# Altium PCB EP600_SENSOR_V1.0.1.PcbDoc
Units mil, origin at the board's own origin, x right, y up, seen from the top; angles counter-clockwise.
Board outline 6000 x 4000 mil, 2 copper layers (Top Layer, Bottom Layer); 6 components, 5 nets, 22 pads, 0 vias.
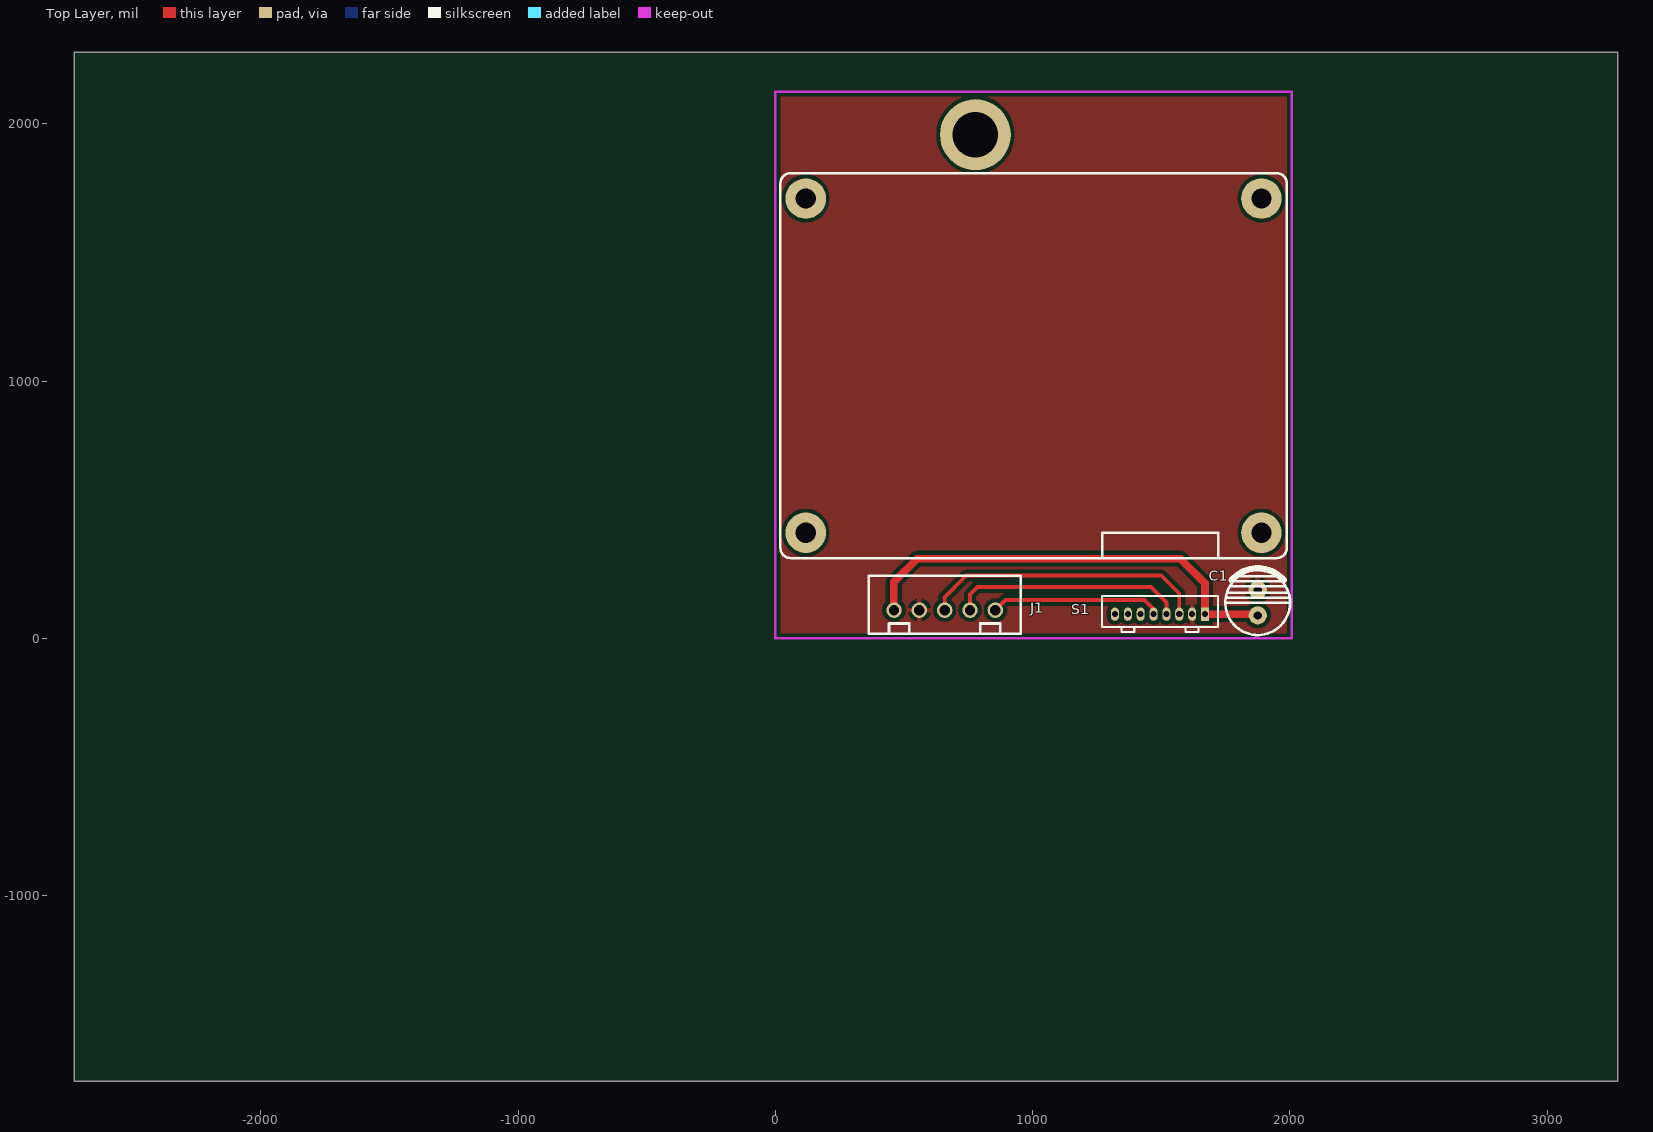
[diagram p0: Top Layer view]
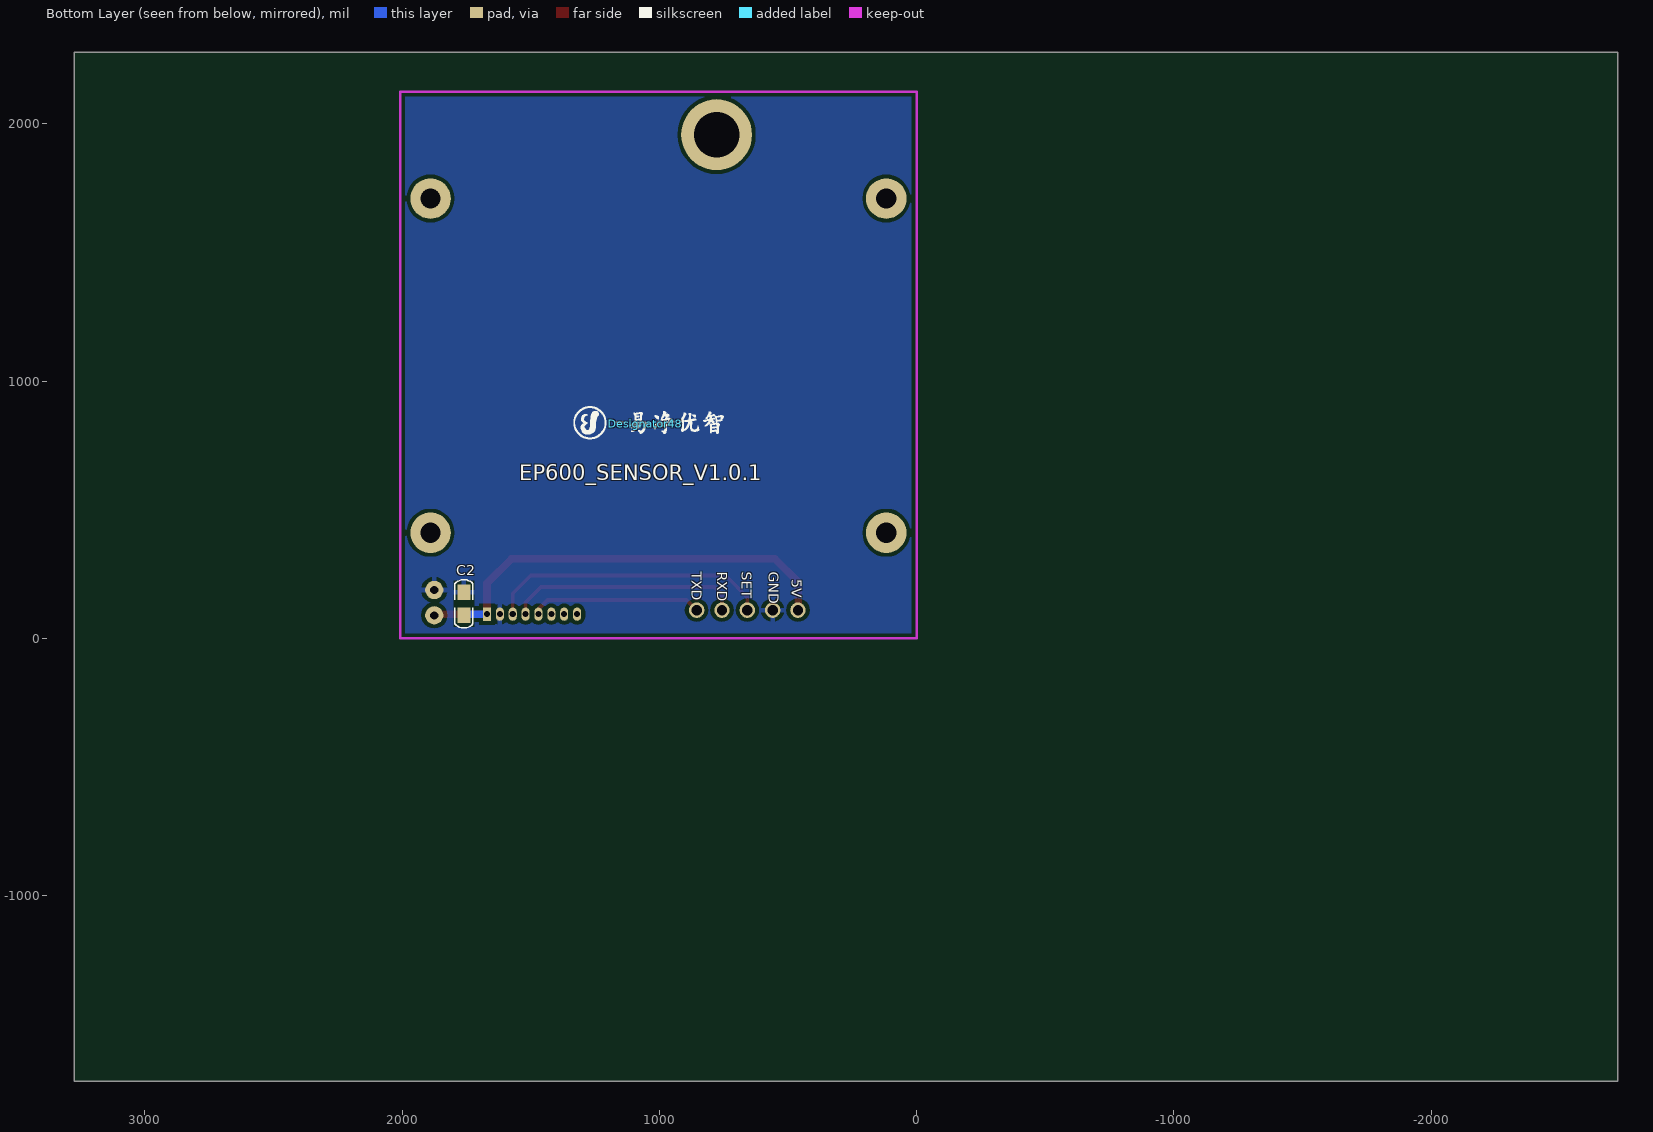
[diagram p1: Bottom Layer view, seen from below]

## Layer stack, top to bottom
Top Layer: signal copper 1.4
Dielectric: dielectric 12.6, FR-4, Dk 4.8
Bottom Layer: signal copper 1.4

## Board outline
-2725.59,-1721.3 3274.41,-1721.3 3274.41,2278.7 -2725.59,2278.7

## Design rules (kind name [scope] priority, off if disabled: settings)
Clearance [All] p1: gap=8
ComponentClearance [All] p1: gap=10 collisioncheckmode=3 verticalgap=10
HoleSize [All] p1: absolutevalues=TRUE maxlimit=500 minlimit=1 maxpercent=80.000 minpercent=20.000
PlaneConnect [All] p1: planeconnectstyle=Relief reliefexpansion=20 reliefentries=4 reliefconductorwidth=20 reliefairgap=10
PolygonConnect [All] p1: connectstyle=Relief reliefconductorwidth=20 reliefentries=4 polygonreliefangle="90 Angle"
RoutingVias [All] p1: holewidth=28 width=50 viastyle="Through Hole" minholewidth=12 minwidth=25 maxholewidth=200 maxwidth=400
SolderMaskExpansion [All] p1: expansion=4
TestPointUsage [All] p1: valid=0 allowmultiple=FALSE
Testpoint [All] p1: side=15 testpointundercomponent=TRUE minsize=40 maxsize=100 preferedsize=60 minholesize=0 maxholesize=40 preferedholesize=32 testpointgrid=1 style=1023 order=0-112345678
Width [All] p1: maxlimit=100 minlimit=10 preferedwidth=10 toplayer_prefwidth=20 bottomlayer_prefwidth=20 minimp=50.000000 maximp=50.000000 favimp=50.000000
16 further rules are at their usual default settings.

## Classes and differential pairs
component class EP600_SENSOR_V1.0: C1 C2 J1 S1

## Components (designator, comment, footprint, x,y, rotation, side; value= is the part's Value field where it differs from the comment)
C1 "100uF/16V" CE06150 1875,90 r180 top
C2 "0.1uF" 0805_C 1760,180 r270 bottom
Designator48 "Comment" PIC_AIRFACTORY-1500 1055,835 r180 bottom
J1 "CON5" XH2.54-5PZ 855,110 r180 top
S1 "PMS5003" "HEADER1X8 1.27" 1495,94.37 r180 top
? "Comment" PMS5003S 117.87,410.98 r0 top

## Footprints (in the part's own frame and the unit in brackets; to place one, negate y for a bottom-side part, rotate by r counter-clockwise, add the part's x,y. Pads: shape width x height; smd on the part's side, far side on the other; paste and mask are expansions set on the pad)
0805_C [mil]
  rect 60x50 smd: 1(0,0) 2(90,0)
  silkscreen extent -48,-35 139,35
CE06150 [mm]
  round 1.8 hole 0.8: 1(0,0) 2(0,-2.5)
  silkscreen extent -3.2,-4.65 3.2,1.95
"HEADER1X8 1.27" [mm]
  rect 0.8x1.3 hole 0.6: 1(-4.445,0)
  oval 0.8x1.3 hole 0.6: 2(-3.175,0) 3(-1.905,0) 4(-0.635,0) 5(0.635,0) 6(1.905,0) 7(3.175,0) 8(4.445,0)
  silkscreen extent -5.71,-1.78 5.71,1.78, body extent -5.71,-1.78 5.71,1.27, height 5
PIC_AIRFACTORY-1500 [mil]
  silkscreen extent -278,-60 305,65
PMS5003S [mm]
  round 4 hole 2: 0(0,0) 0(0,33) 0(45,0) 0(45,33)
  silkscreen extent -2.5,-2.5 47.5,35.5
XH2.54-5PZ [mil]
  round 60 hole 40: 1(0,0) 2(98.43,0) 3(196.85,0) 4(295.28,0) 5(393.7,0)
  silkscreen extent -98,-134 492,93

## Part data
C1: library part ECAP, "E-CAP"
C2: library part Cap, "Capacitor"
J1: library part CON6, "Connector"

## Free pads (board coordinates)
  round 275.59 hole 177.17: 0(777.56,1958.66)

## Nets (pads, with @x,y where several pads share a name; then routed paths per layer and width w, separated by ;. In a path a pad name is that pad's centre, name@x,y a point inside that pad or via, vN(x,y) a via of type N, cw(c..) or ccw(c..) an arc to the next point about the centre after c; other vN are vias at no path point)
5V: C1.1 C2.2 J1.5 S1.1 | length 1815.7
  Top Layer w30: J1.5 460,111.3 460,219.37 550.63,310 1574.37,310 1670,214.37 S1.1 1870.63,94.37 C1.1
  Bottom Layer w30: S1.1 1755.63,94.37 C2.2
GND: C1.2 C2.1 J1.4 S1.2 | length 11.9
  Bottom Layer w15: C2.1 C2.1@1768.43,188.43
NetJ1_1: J1.1 S1.5 | length 666.7
  Top Layer w15: J1.1 895,150 1435,150 1470,115 S1.5
NetJ1_2: J1.2 S1.4 | length 907.3
  Top Layer w15: J1.2 756.57,171.57 785,200 1460,200 1520,140 S1.4
NetJ1_3: J1.3 S1.3 | length 1108
  Top Layer w15: 656.85,159.37 741.85,244.37 1500,244.37 1570,174.37 S1.3 ; J1.3 658.15,160.67
pads on no net: ?.0 S1.6 S1.7 S1.8

## Polygon pours and split planes (outlines as drawn)
GND on Top Layer "Top Layer-No Net" (solid, remove dead copper, pour order 1000): -111.16,2192.38 2023.84,2192.38 2178.84,2037.38 2178.84,67.38 2018.84,-92.62 48.84,-92.62 -241.16,197.38 -241.16,2062.38 -111.16,2192.38
GND on Bottom Layer "Bottom Layer-No Net" (solid, remove dead copper, pour order 1001): -33.07,2198.86 -33.07,13.86 16.93,-36.14 2016.93,-36.14 2081.93,28.86 2081.93,2113.86 1981.93,2213.86 -18.07,2213.86 -33.07,2198.86

## Keep-outs
Keep-Out Layer:
  lines w10: 0,0 0,2125.98 2007.87,2125.98 2007.87,0 0,0

## Silkscreen, mask and mechanical layers (free items; w line width, h text height)
Bottom Overlay:
  text "EP600_SENSOR_V1.0.1" at 1545,615 h60
  text "GND" at 575,260 h40 r90
  text "SET" at 680,260 h40 r90
  text "RXD" at 775,260 h40 r90
  text "TXD" at 875,260 h40 r90
  text "5V" at 485,230 h40 r90
Mechanical 1:
  lines w10: 0,0 2007.87,0 2007.87,2125.98 0,2125.98 0,0

## Text inside footprints (layer, text, board x,y; h text height)
S1: Mechanical 10 "1" at 1707.6,114.06 h31.5 r180